# Altium PCB Choin1_0.PcbDoc (part 1 of 3)
Units mm, origin at the board's own origin, x right, y up, seen from the top; angles counter-clockwise.
Board outline 61 x 61 mm, 6 copper layers (Top Layer, MidLayer1, MidLayer 2, Mid-Layer 3, Mid-Layer 4, Bottom Layer), stack 1.533 mm thick; 195 components, 482 nets, 1610 pads, 432 vias.
Unrouted connection lines stored in the file: 170.
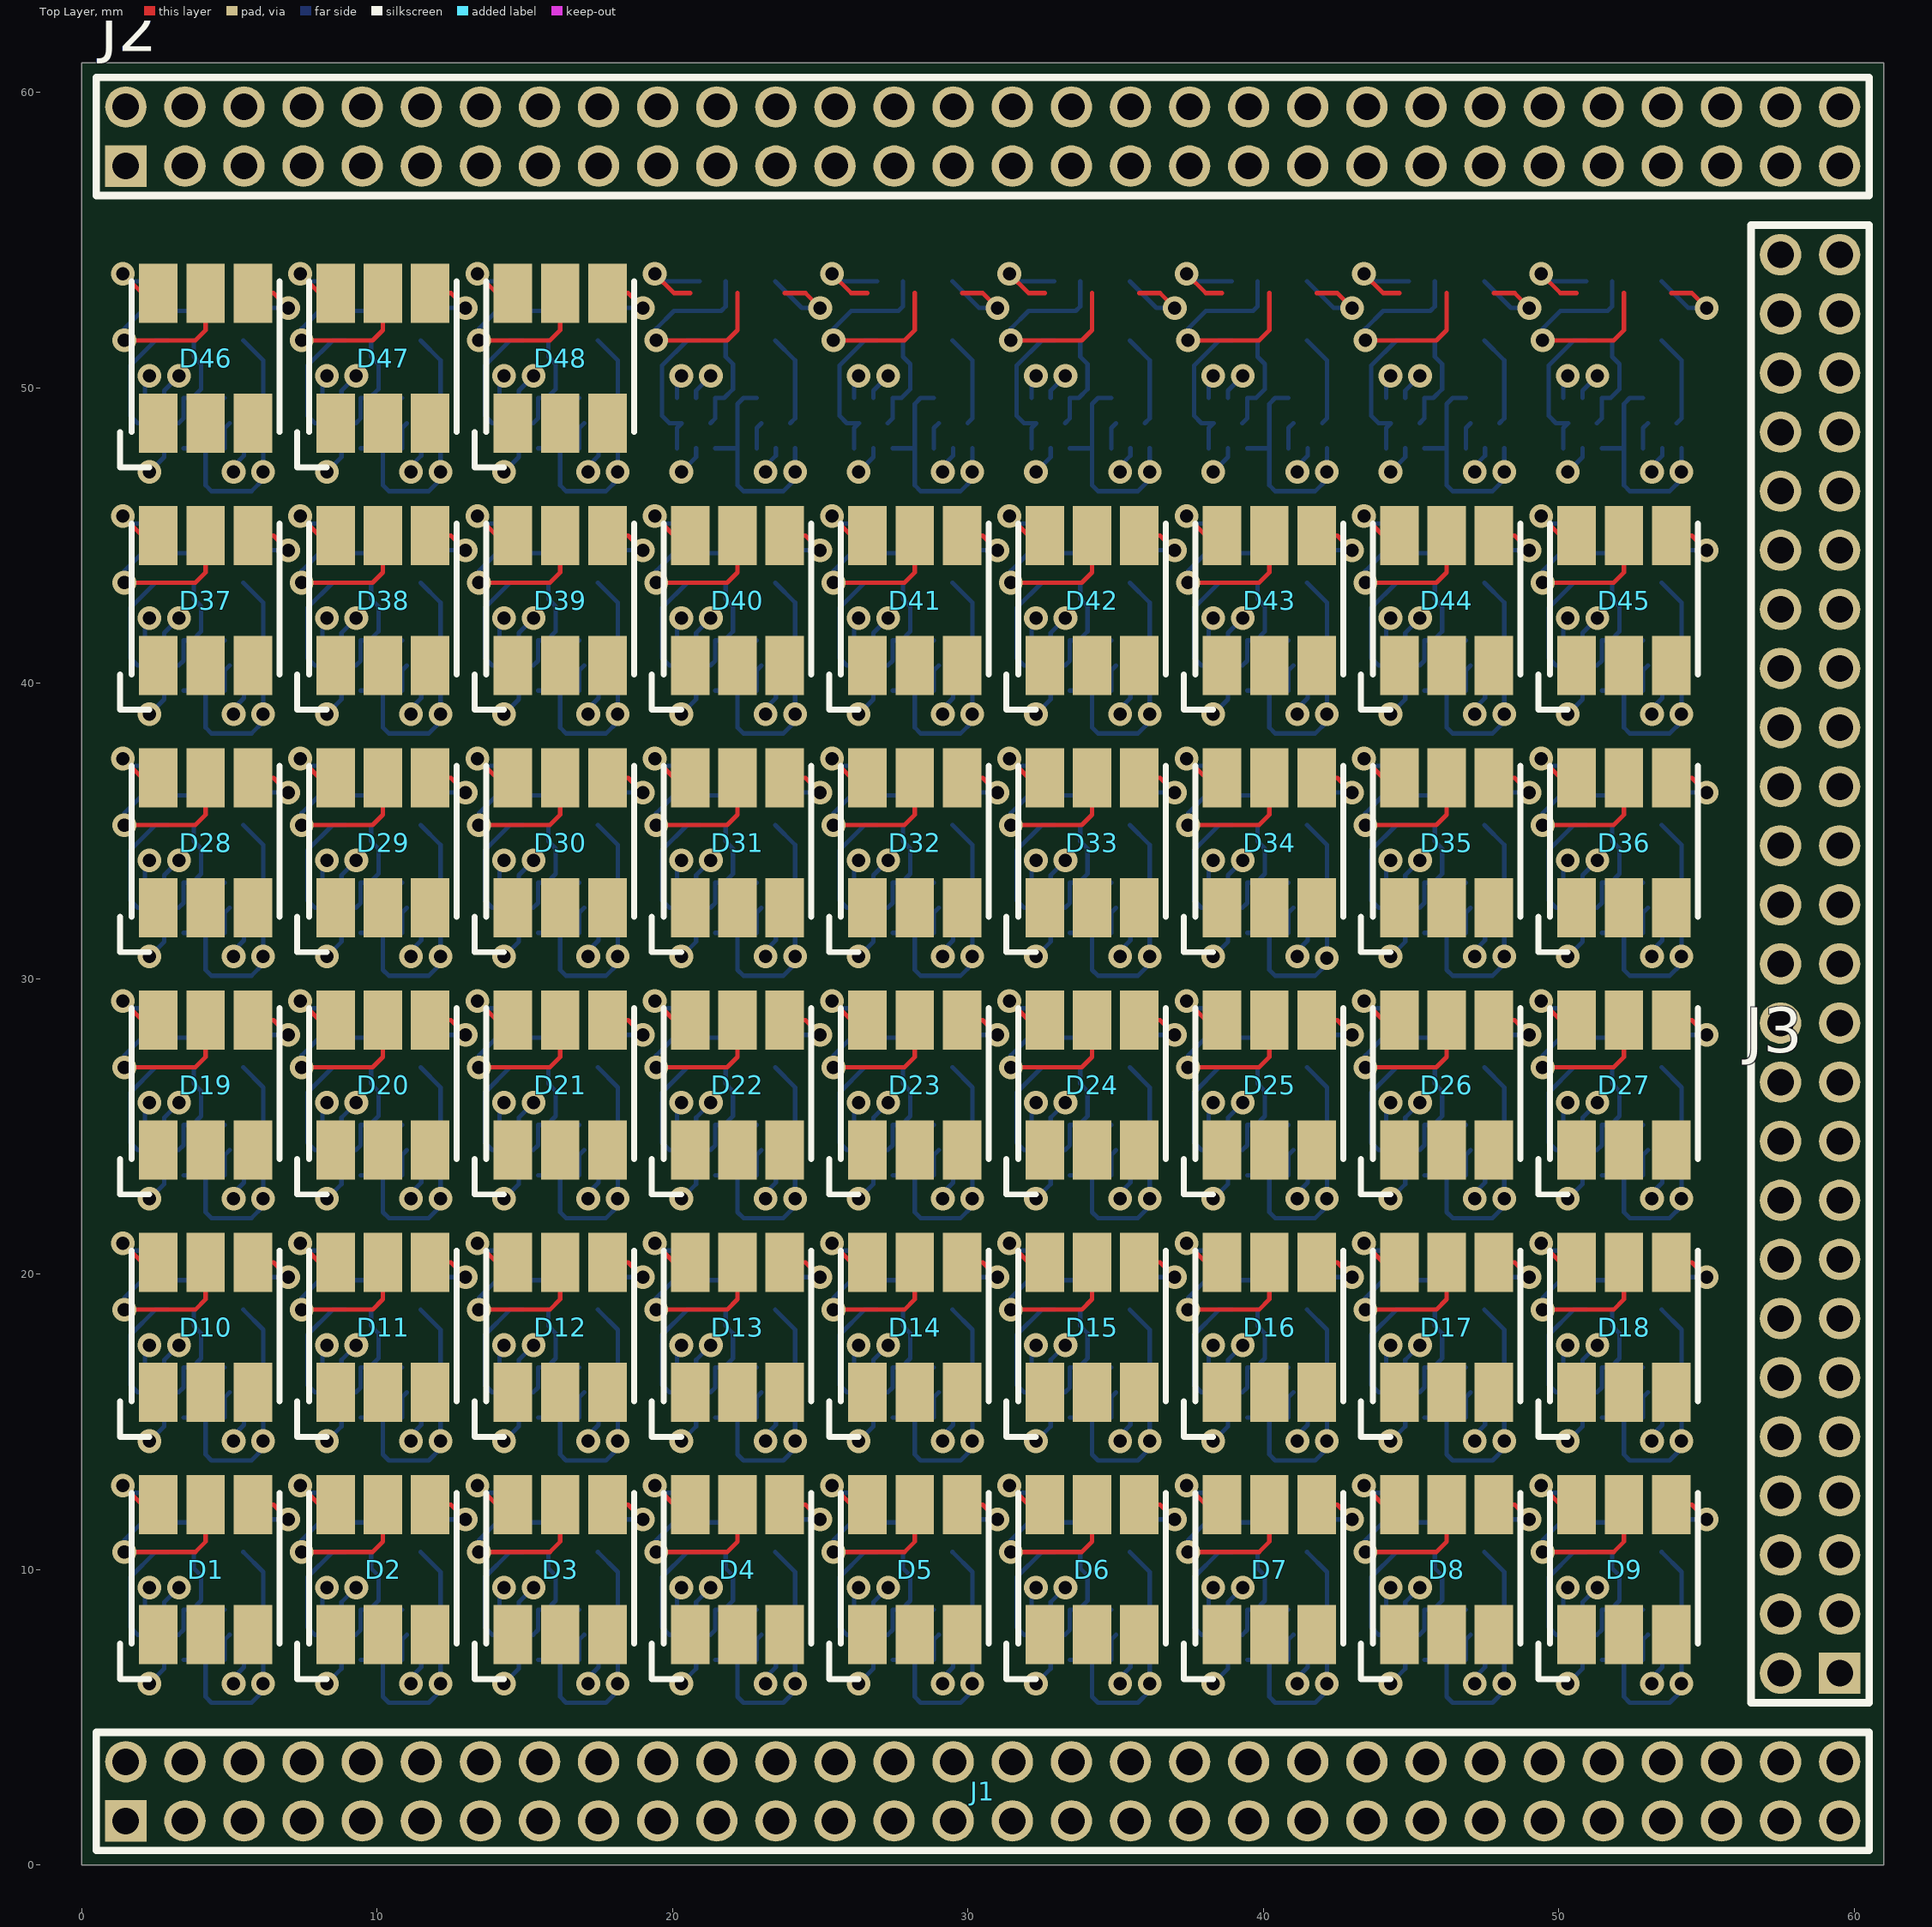
[diagram p0: Top Layer view]
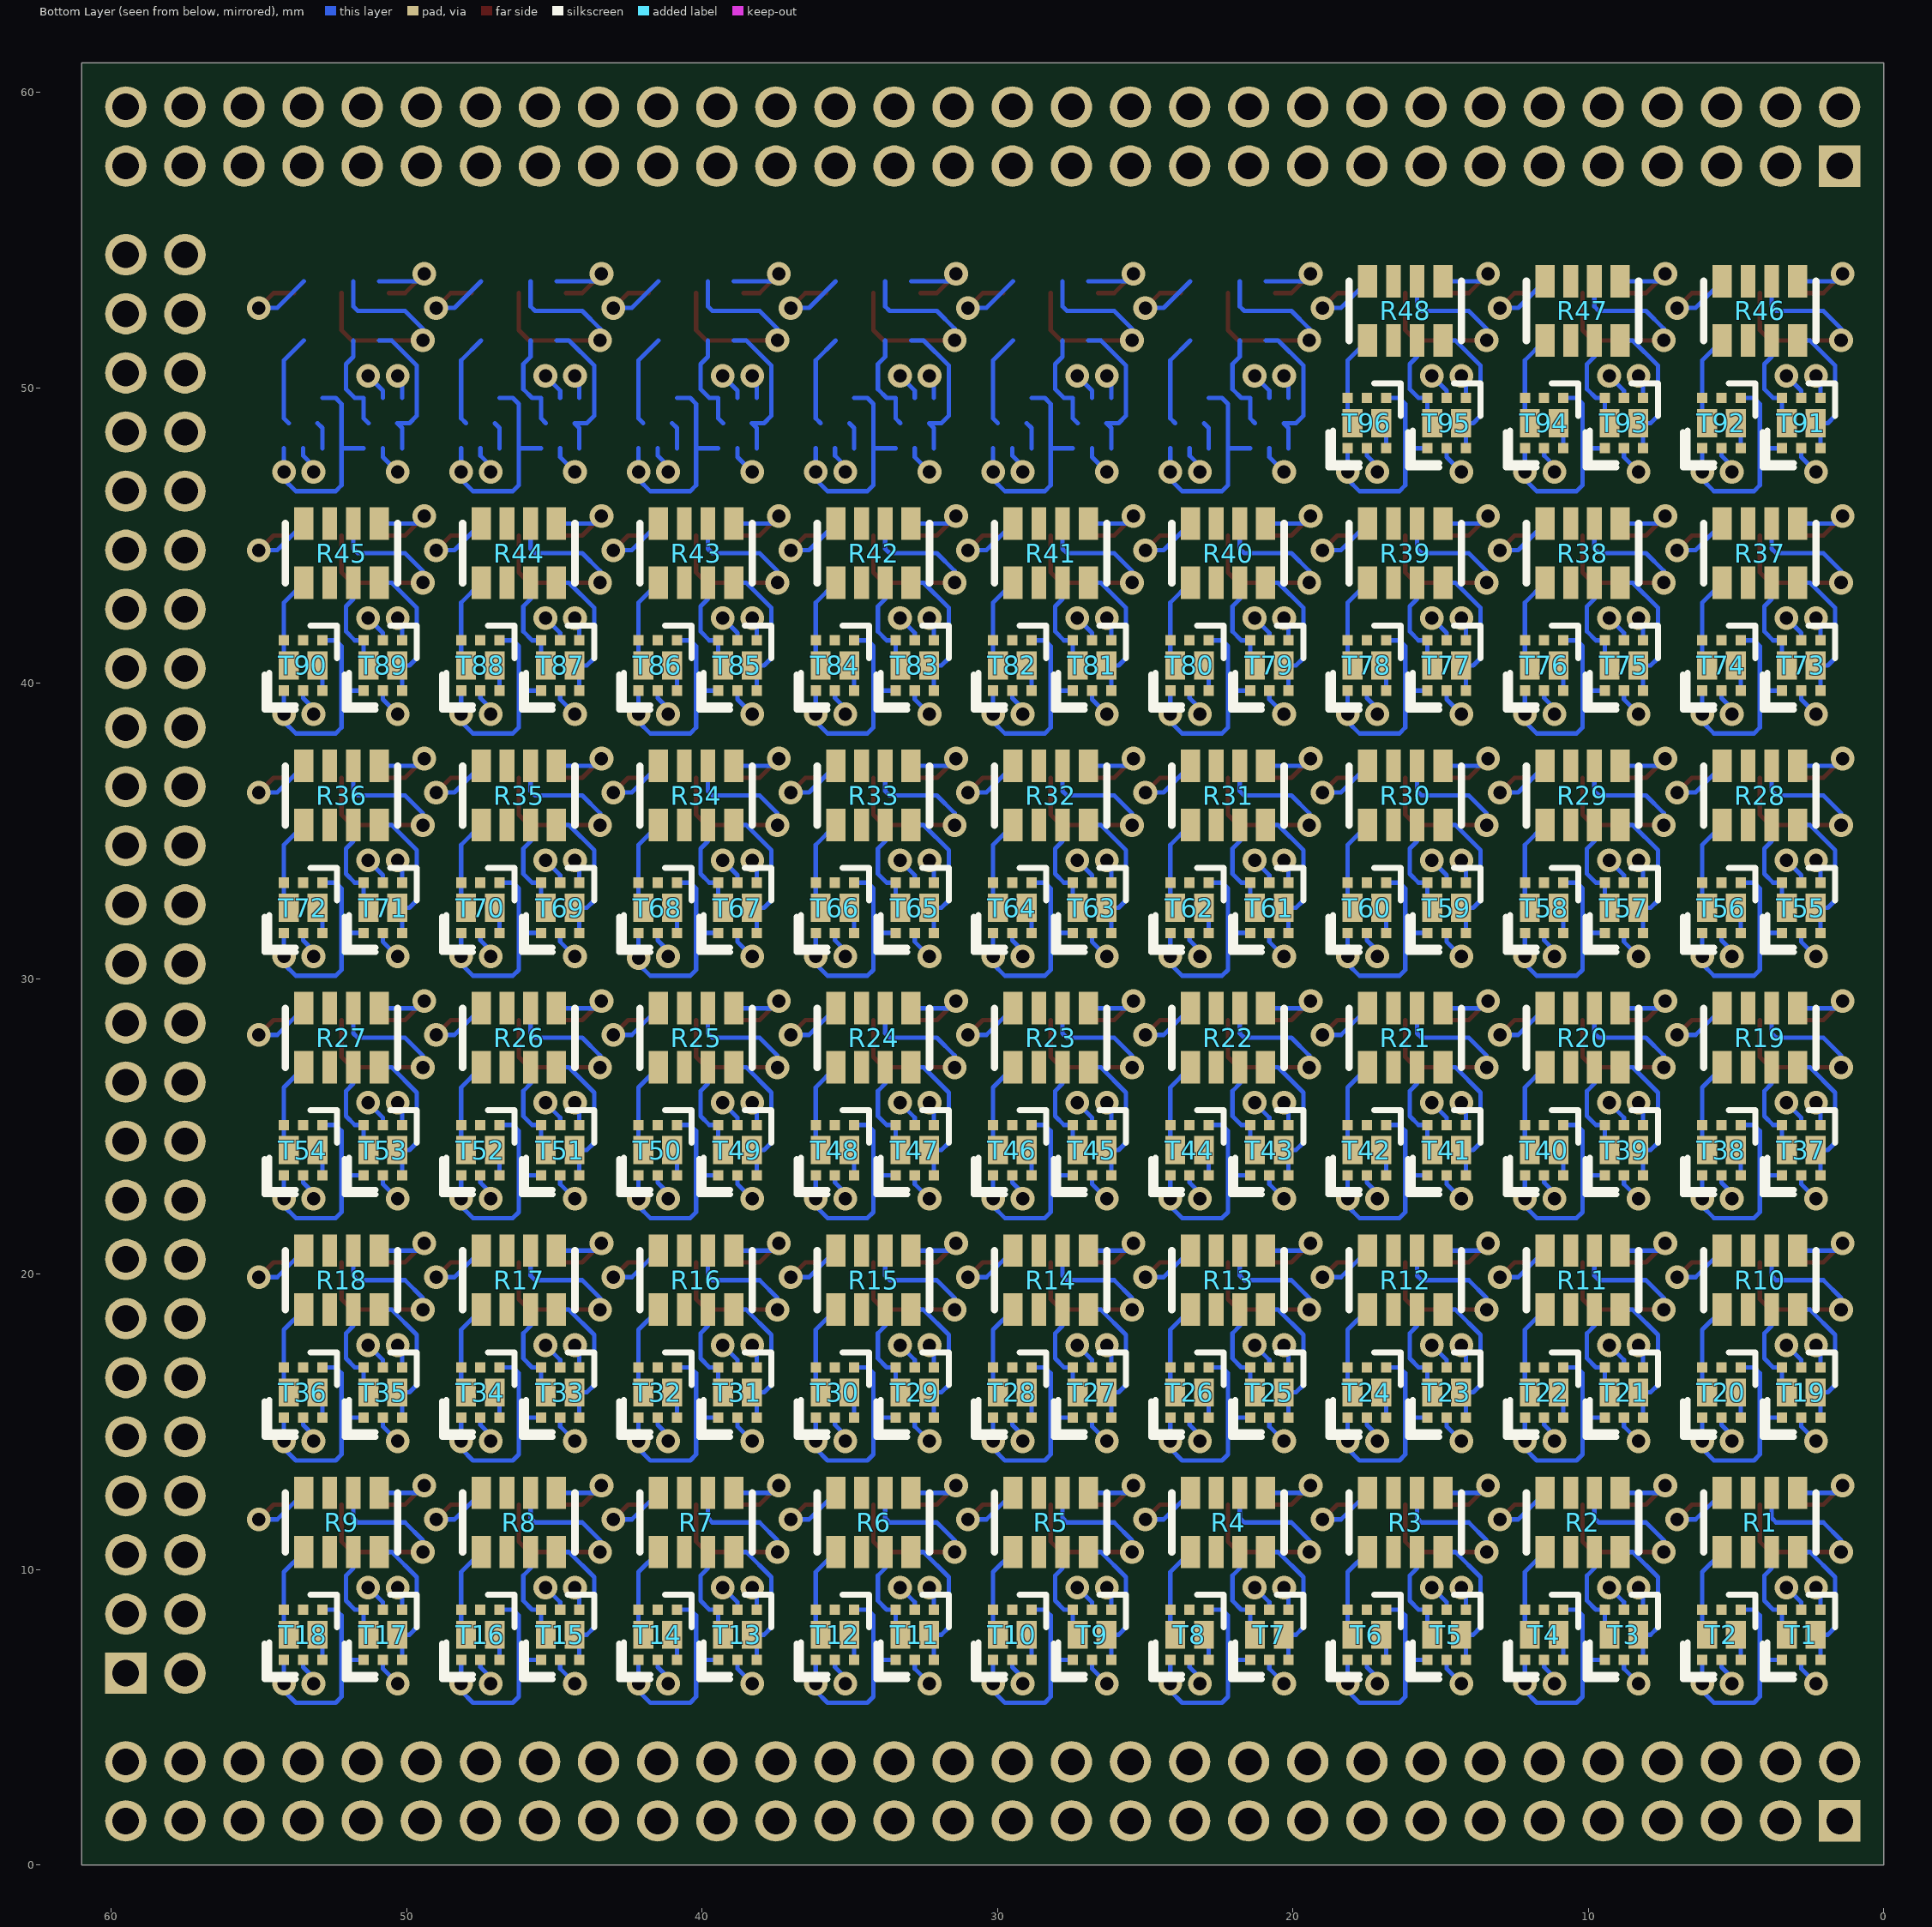
[diagram p1: Bottom Layer view, seen from below]

## Layer stack, top to bottom
Top Layer: signal copper 0.0356
Dielectric: core 0.3, FR-4, Dk 4.8
MidLayer1: signal copper 0.0356
Dielectric: prepreg 0.2, FR-4, Dk 4.8
MidLayer 2: signal copper 0.0356
Dielectric: core 0.3, FR-4, Dk 4.8
Mid-Layer 3: signal copper 0.0356
Dielectric: prepreg 0.2, FR-4, Dk 4.8
Mid-Layer 4: signal copper 0.0356
Dielectric: core 0.32, FR-4, Dk 4.8
Bottom Layer: signal copper 0.0356

## Board outline
0,0 61,0 61,61 0,61

## Design rules (kind name [scope] priority, off if disabled: settings)
Clearance [All] p1: gap=0.15
ComponentClearance [All] p1 off: gap=0.254 collisioncheckmode=3 verticalgap=0.254 showdistances=FALSE
HoleSize [All] p1: absolutevalues=TRUE maxlimit=2.54 minlimit=0.45 maxpercent=80.000 minpercent=20.000
MinimumSolderMaskSliver [All] p1 off: minsoldermaskwidth=0.254
PlaneClearance [All] p1: clearance=0.25
PlaneConnect [All] p1: planeconnectstyle=Relief reliefexpansion=0.25 reliefentries=4 reliefconductorwidth=0.15 reliefairgap=0.2
PolygonConnect [All] p1: connectstyle=Relief reliefconductorwidth=0.254 reliefentries=4 polygonreliefangle="90 Angle"
RoutingVias [All] p1: holewidth=0.45 width=0.8 viastyle="Through Hole" minholewidth=0.45 minwidth=0.8 maxholewidth=2 maxwidth=4
SilkToSilkClearance [All] p1 off: silktosilkclearance=0.254
SilkscreenOverComponentPads [All] p1: minsilkscreentomaskgap=0.1
SolderMaskExpansion [All] p1: expansion=0.102
Width [All] p1: maxlimit=4 minlimit=0.15 preferedwidth=0.15
21 further rules are at their usual default settings.

## Classes and differential pairs
net class GLEDR[47..0]: GLEDR0 GLEDR1 GLEDR2 GLEDR3 GLEDR4 GLEDR5 GLEDR6 GLEDR7 GLEDR8 GLEDR9 GLEDR10 GLEDR11 GLEDR12 GLEDR13 GLEDR14 GLEDR15 GLEDR16 GLEDR17 GLEDR18 GLEDR19 GLEDR20 GLEDR21 GLEDR22 GLEDR23 GLEDR24 GLEDR25 GLEDR26 GLEDR27 GLEDR28 GLEDR29 GLEDR30 GLEDR31 GLEDR32 GLEDR33 GLEDR34 GLEDR35 GLEDR36 GLEDR37 GLEDR38 GLEDR39 GLEDR40 GLEDR41 GLEDR42 GLEDR43 GLEDR44 GLEDR45 GLEDR46 GLEDR47
net class GLEDG[47..0]: GLEDG0 GLEDG1 GLEDG2 GLEDG3 GLEDG4 GLEDG5 GLEDG6 GLEDG7 GLEDG8 GLEDG9 GLEDG10 GLEDG11 GLEDG12 GLEDG13 GLEDG14 GLEDG15 GLEDG16 GLEDG17 GLEDG18 GLEDG19 GLEDG20 GLEDG21 GLEDG22 GLEDG23 GLEDG24 GLEDG25 GLEDG26 GLEDG27 GLEDG28 GLEDG29 GLEDG30 GLEDG31 GLEDG32 GLEDG33 GLEDG34 GLEDG35 GLEDG36 GLEDG37 GLEDG38 GLEDG39 GLEDG40 GLEDG41 GLEDG42 GLEDG43 GLEDG44 GLEDG45 GLEDG46 GLEDG47
net class GLEDB[47..0]: GLEDB0 GLEDB1 GLEDB2 GLEDB3 GLEDB4 GLEDB5 GLEDB6 GLEDB7 GLEDB8 GLEDB9 GLEDB10 GLEDB11 GLEDB12 GLEDB13 GLEDB14 GLEDB15 GLEDB16 GLEDB17 GLEDB18 GLEDB19 GLEDB20 GLEDB21 GLEDB22 GLEDB23 GLEDB24 GLEDB25 GLEDB26 GLEDB27 GLEDB28 GLEDB29 GLEDB30 GLEDB31 GLEDB32 GLEDB33 GLEDB34 GLEDB35 GLEDB36 GLEDB37 GLEDB38 GLEDB39 GLEDB40 GLEDB41 GLEDB42 GLEDB43 GLEDB44 GLEDB45 GLEDB46 GLEDB47
component class Zlacza: J1 J2 J3
net class RLEDR[47..0]: RLEDR0 RLEDR1 RLEDR2 RLEDR3 RLEDR4 RLEDR5 RLEDR6 RLEDR7 RLEDR8 RLEDR9 RLEDR10 RLEDR11 RLEDR12 RLEDR13 RLEDR14 RLEDR15 RLEDR16 RLEDR17 RLEDR18 RLEDR19 RLEDR20 RLEDR21 RLEDR22 RLEDR23 RLEDR24 RLEDR25 RLEDR26 RLEDR27 RLEDR28 RLEDR29 RLEDR30 RLEDR31 RLEDR32 RLEDR33 RLEDR34 RLEDR35 RLEDR36 RLEDR37 RLEDR38 RLEDR39 RLEDR40 RLEDR41 RLEDR42 RLEDR43 RLEDR44 RLEDR45 RLEDR46 RLEDR47
net class RLEDG[47..0]: RLEDG0 RLEDG1 RLEDG2 RLEDG3 RLEDG4 RLEDG5 RLEDG6 RLEDG7 RLEDG8 RLEDG9 RLEDG10 RLEDG11 RLEDG12 RLEDG13 RLEDG14 RLEDG15 RLEDG16 RLEDG17 RLEDG18 RLEDG19 RLEDG20 RLEDG21 RLEDG22 RLEDG23 RLEDG24 RLEDG25 RLEDG26 RLEDG27 RLEDG28 RLEDG29 RLEDG30 RLEDG31 RLEDG32 RLEDG33 RLEDG34 RLEDG35 RLEDG36 RLEDG37 RLEDG38 RLEDG39 RLEDG40 RLEDG41 RLEDG42 RLEDG43 RLEDG44 RLEDG45 RLEDG46 RLEDG47
net class RLEDB[47..0]: RLEDB0 RLEDB1 RLEDB2 RLEDB3 RLEDB4 RLEDB5 RLEDB6 RLEDB7 RLEDB8 RLEDB9 RLEDB10 RLEDB11 RLEDB12 RLEDB13 RLEDB14 RLEDB15 RLEDB16 RLEDB17 RLEDB18 RLEDB19 RLEDB20 RLEDB21 RLEDB22 RLEDB23 RLEDB24 RLEDB25 RLEDB26 RLEDB27 RLEDB28 RLEDB29 RLEDB30 RLEDB31 RLEDB32 RLEDB33 RLEDB34 RLEDB35 RLEDB36 RLEDB37 RLEDB38 RLEDB39 RLEDB40 RLEDB41 RLEDB42 RLEDB43 RLEDB44 RLEDB45 RLEDB46 RLEDB47
net class LEDR[47..0]: LEDR0 LEDR1 LEDR2 LEDR3 LEDR4 LEDR5 LEDR6 LEDR7 LEDR8 LEDR9 LEDR10 LEDR11 LEDR12 LEDR13 LEDR14 LEDR15 LEDR16 LEDR17 LEDR18 LEDR19 LEDR20 LEDR21 LEDR22 LEDR23 LEDR24 LEDR25 LEDR26 LEDR27 LEDR28 LEDR29 LEDR30 LEDR31 LEDR32 LEDR33 LEDR34 LEDR35 LEDR36 LEDR37 LEDR38 LEDR39 LEDR40 LEDR41 LEDR42 LEDR43 LEDR44 LEDR45 LEDR46 LEDR47
net class LEDG[47..0]: LEDG0 LEDG1 LEDG2 LEDG3 LEDG4 LEDG5 LEDG6 LEDG7 LEDG8 LEDG9 LEDG10 LEDG11 LEDG12 LEDG13 LEDG14 LEDG15 LEDG16 LEDG17 LEDG18 LEDG19 LEDG20 LEDG21 LEDG22 LEDG23 LEDG24 LEDG25 LEDG26 LEDG27 LEDG28 LEDG29 LEDG30 LEDG31 LEDG32 LEDG33 LEDG34 LEDG35 LEDG36 LEDG37 LEDG38 LEDG39 LEDG40 LEDG41 LEDG42 LEDG43 LEDG44 LEDG45 LEDG46 LEDG47
net class LEDB[47..0]: LEDB0 LEDB1 LEDB2 LEDB3 LEDB4 LEDB5 LEDB6 LEDB7 LEDB8 LEDB9 LEDB10 LEDB11 LEDB12 LEDB13 LEDB14 LEDB15 LEDB16 LEDB17 LEDB18 LEDB19 LEDB20 LEDB21 LEDB22 LEDB23 LEDB24 LEDB25 LEDB26 LEDB27 LEDB28 LEDB29 LEDB30 LEDB31 LEDB32 LEDB33 LEDB34 LEDB35 LEDB36 LEDB37 LEDB38 LEDB39 LEDB40 LEDB41 LEDB42 LEDB43 LEDB44 LEDB45 LEDB46 LEDB47
component class "Rezystory ogr.": R1 R2 R3 R4 R5 R6 R7 R8 R9 R10 R11 R12 R13 R14 R15 R16 R17 R18 R19 R20 R21 R22 R23 R24 R25 R26 R27 R28 R29 R30 R31 R32 R33 R34 R35 R36 R37 R38 R39 R40 R41 R42 R43 R44 R45 R46 R47 R48
component class LED: D1 D2 D3 D4 D5 D6 D7 D8 D9 D10 D11 D12 D13 D14 D15 D16 D17 D18 D19 D20 D21 D22 D23 D24 D25 D26 D27 D28 D29 D30 D31 D32 D33 D34 D35 D36 D37 D38 D39 D40 D41 D42 D43 D44 D45 D46 D47 D48
component class Tranzystory: T1 T2 T3 T4 T5 T6 T7 T8 T9 T10 T11 T12 T13 T14 T15 T16 T17 T18 T19 T20 T21 T22 T23 T24 T25 T26 T27 T28 T29 T30 T31 T32 T33 T34 T35 T36 T37 T38 T39 T40 T41 T42 T43 T44 T45 T46 T47 T48 T49 T50 T51 T52 T53 T54 T55 T56 T57 T58 T59 T60 T61 T62 T63 T64 T65 T66 T67 T68 T69 T70 T71 T72 T73 T74 T75 T76 T77 T78 T79 T80 T81 T82 T83 T84 T85 T86 T87 T88 T89 T90 T91 T92 T93 T94 T95 T96

## Components (designator, comment, footprint, x,y, rotation, side; value= is the part's Value field where it differs from the comment)
D1 "OF-SMD5060RGB-W" OF-SMD5060RGB-W 4.2,10 r90 top
D2 "OF-SMD5060RGB-W" OF-SMD5060RGB-W 10.2,10 r90 top
D3 "OF-SMD5060RGB-W" OF-SMD5060RGB-W 16.2,10 r90 top
D4 "OF-SMD5060RGB-W" OF-SMD5060RGB-W 22.2,10 r90 top
D5 "OF-SMD5060RGB-W" OF-SMD5060RGB-W 28.2,10 r90 top
D6 "OF-SMD5060RGB-W" OF-SMD5060RGB-W 34.2,10 r90 top
D7 "OF-SMD5060RGB-W" OF-SMD5060RGB-W 40.2,10 r90 top
D8 "OF-SMD5060RGB-W" OF-SMD5060RGB-W 46.2,10 r90 top
D9 "OF-SMD5060RGB-W" OF-SMD5060RGB-W 52.2,10 r90 top
D10 "OF-SMD5060RGB-W" OF-SMD5060RGB-W 4.2,18.2 r90 top
D11 "OF-SMD5060RGB-W" OF-SMD5060RGB-W 10.2,18.2 r90 top
D12 "OF-SMD5060RGB-W" OF-SMD5060RGB-W 16.2,18.2 r90 top
D13 "OF-SMD5060RGB-W" OF-SMD5060RGB-W 22.2,18.2 r90 top
D14 "OF-SMD5060RGB-W" OF-SMD5060RGB-W 28.2,18.2 r90 top
D15 "OF-SMD5060RGB-W" OF-SMD5060RGB-W 34.2,18.2 r90 top
D16 "OF-SMD5060RGB-W" OF-SMD5060RGB-W 40.2,18.2 r90 top
D17 "OF-SMD5060RGB-W" OF-SMD5060RGB-W 46.2,18.2 r90 top
D18 "OF-SMD5060RGB-W" OF-SMD5060RGB-W 52.2,18.2 r90 top
D19 "OF-SMD5060RGB-W" OF-SMD5060RGB-W 4.2,26.4 r90 top
D20 "OF-SMD5060RGB-W" OF-SMD5060RGB-W 10.2,26.4 r90 top
D21 "OF-SMD5060RGB-W" OF-SMD5060RGB-W 16.2,26.4 r90 top
D22 "OF-SMD5060RGB-W" OF-SMD5060RGB-W 22.2,26.4 r90 top
D23 "OF-SMD5060RGB-W" OF-SMD5060RGB-W 28.2,26.4 r90 top
D24 "OF-SMD5060RGB-W" OF-SMD5060RGB-W 34.2,26.4 r90 top
D25 "OF-SMD5060RGB-W" OF-SMD5060RGB-W 40.2,26.4 r90 top
D26 "OF-SMD5060RGB-W" OF-SMD5060RGB-W 46.2,26.4 r90 top
D27 "OF-SMD5060RGB-W" OF-SMD5060RGB-W 52.2,26.4 r90 top
D28 "OF-SMD5060RGB-W" OF-SMD5060RGB-W 4.2,34.6 r90 top
D29 "OF-SMD5060RGB-W" OF-SMD5060RGB-W 10.2,34.6 r90 top
D30 "OF-SMD5060RGB-W" OF-SMD5060RGB-W 16.2,34.6 r90 top
D31 "OF-SMD5060RGB-W" OF-SMD5060RGB-W 22.2,34.6 r90 top
D32 "OF-SMD5060RGB-W" OF-SMD5060RGB-W 28.2,34.6 r90 top
D33 "OF-SMD5060RGB-W" OF-SMD5060RGB-W 34.2,34.6 r90 top
D34 "OF-SMD5060RGB-W" OF-SMD5060RGB-W 40.2,34.6 r90 top
D35 "OF-SMD5060RGB-W" OF-SMD5060RGB-W 46.2,34.6 r90 top
D36 "OF-SMD5060RGB-W" OF-SMD5060RGB-W 52.2,34.6 r90 top
D37 "OF-SMD5060RGB-W" OF-SMD5060RGB-W 4.2,42.8 r90 top
D38 "OF-SMD5060RGB-W" OF-SMD5060RGB-W 10.2,42.8 r90 top
D39 "OF-SMD5060RGB-W" OF-SMD5060RGB-W 16.2,42.8 r90 top
D40 "OF-SMD5060RGB-W" OF-SMD5060RGB-W 22.2,42.8 r90 top
D41 "OF-SMD5060RGB-W" OF-SMD5060RGB-W 28.2,42.8 r90 top
D42 "OF-SMD5060RGB-W" OF-SMD5060RGB-W 34.2,42.8 r90 top
D43 "OF-SMD5060RGB-W" OF-SMD5060RGB-W 40.2,42.8 r90 top
D44 "OF-SMD5060RGB-W" OF-SMD5060RGB-W 46.2,42.8 r90 top
D45 "OF-SMD5060RGB-W" OF-SMD5060RGB-W 52.2,42.8 r90 top
D46 "OF-SMD5060RGB-W" OF-SMD5060RGB-W 4.2,51 r90 top
D47 "OF-SMD5060RGB-W" OF-SMD5060RGB-W 10.2,51 r90 top
D48 "OF-SMD5060RGB-W" OF-SMD5060RGB-W 16.2,51 r90 top
J1 "PLMD80S-60pin" PLMD60S 1.5,2.5 r0 top locked
J2 "PLMD80S-60pin" PLMD60S 1.5,58.5 r0 top locked
J3 "PLMD80S-50pin" PLMD50S 58.5,6.5 r90 top locked
R1 "CAY16-6800F4" 1206RPS 4.2,11.6 r180 bottom
R2 "CAY16-6800F4" 1206RPS 10.2,11.6 r180 bottom
R3 "CAY16-6800F4" 1206RPS 16.2,11.6 r180 bottom
R4 "CAY16-6800F4" 1206RPS 22.2,11.6 r180 bottom
R5 "CAY16-6800F4" 1206RPS 28.2,11.6 r180 bottom
R6 "CAY16-6800F4" 1206RPS 34.2,11.6 r180 bottom
R7 "CAY16-6800F4" 1206RPS 40.2,11.6 r180 bottom
R8 "CAY16-6800F4" 1206RPS 46.2,11.6 r180 bottom
R9 "CAY16-6800F4" 1206RPS 52.2,11.6 r180 bottom
R10 "CAY16-6800F4" 1206RPS 4.2,19.8 r180 bottom
R11 "CAY16-6800F4" 1206RPS 10.2,19.8 r180 bottom
R12 "CAY16-6800F4" 1206RPS 16.2,19.8 r180 bottom
R13 "CAY16-6800F4" 1206RPS 22.2,19.8 r180 bottom
R14 "CAY16-6800F4" 1206RPS 28.2,19.8 r180 bottom
R15 "CAY16-6800F4" 1206RPS 34.2,19.8 r180 bottom
R16 "CAY16-6800F4" 1206RPS 40.2,19.8 r180 bottom
R17 "CAY16-6800F4" 1206RPS 46.2,19.8 r180 bottom
R18 "CAY16-6800F4" 1206RPS 52.2,19.8 r180 bottom
R19 "CAY16-6800F4" 1206RPS 4.2,28 r180 bottom
R20 "CAY16-6800F4" 1206RPS 10.2,28 r180 bottom
R21 "CAY16-6800F4" 1206RPS 16.2,28 r180 bottom
R22 "CAY16-6800F4" 1206RPS 22.2,28 r180 bottom
R23 "CAY16-6800F4" 1206RPS 28.2,28 r180 bottom
R24 "CAY16-6800F4" 1206RPS 34.2,28 r180 bottom
R25 "CAY16-6800F4" 1206RPS 40.2,28 r180 bottom
R26 "CAY16-6800F4" 1206RPS 46.2,28 r180 bottom
R27 "CAY16-6800F4" 1206RPS 52.2,28 r180 bottom
R28 "CAY16-6800F4" 1206RPS 4.2,36.2 r180 bottom
R29 "CAY16-6800F4" 1206RPS 10.2,36.2 r180 bottom
R30 "CAY16-6800F4" 1206RPS 16.2,36.2 r180 bottom
R31 "CAY16-6800F4" 1206RPS 22.2,36.2 r180 bottom
R32 "CAY16-6800F4" 1206RPS 28.2,36.2 r180 bottom
R33 "CAY16-6800F4" 1206RPS 34.2,36.2 r180 bottom
R34 "CAY16-6800F4" 1206RPS 40.2,36.2 r180 bottom
R35 "CAY16-6800F4" 1206RPS 46.2,36.2 r180 bottom
R36 "CAY16-6800F4" 1206RPS 52.2,36.2 r180 bottom
R37 "CAY16-6800F4" 1206RPS 4.2,44.4 r180 bottom
R38 "CAY16-6800F4" 1206RPS 10.2,44.4 r180 bottom
R39 "CAY16-6800F4" 1206RPS 16.2,44.4 r180 bottom
R40 "CAY16-6800F4" 1206RPS 22.2,44.4 r180 bottom
R41 "CAY16-6800F4" 1206RPS 28.2,44.4 r180 bottom
R42 "CAY16-6800F4" 1206RPS 34.2,44.4 r180 bottom
R43 "CAY16-6800F4" 1206RPS 40.2,44.4 r180 bottom
R44 "CAY16-6800F4" 1206RPS 46.2,44.4 r180 bottom
R45 "CAY16-6800F4" 1206RPS 52.2,44.4 r180 bottom
R46 "CAY16-6800F4" 1206RPS 4.2,52.6 r180 bottom
R47 "CAY16-6800F4" 1206RPS 10.2,52.6 r180 bottom
R48 "CAY16-6800F4" 1206RPS 16.2,52.6 r180 bottom
T1 "IRLHS6376TR2PBF" PQFN2X2DUAL 2.8,7.8 r180 bottom
T2 "IRLHS6376TR2PBF" PQFN2X2DUAL 5.5,7.8 r180 bottom
T3 "IRLHS6376TR2PBF" PQFN2X2DUAL 8.8,7.8 r180 bottom
T4 "IRLHS6376TR2PBF" PQFN2X2DUAL 11.5,7.8 r180 bottom
T5 "IRLHS6376TR2PBF" PQFN2X2DUAL 14.8,7.8 r180 bottom
T6 "IRLHS6376TR2PBF" PQFN2X2DUAL 17.5,7.8 r180 bottom
T7 "IRLHS6376TR2PBF" PQFN2X2DUAL 20.8,7.8 r180 bottom
T8 "IRLHS6376TR2PBF" PQFN2X2DUAL 23.5,7.8 r180 bottom
T9 "IRLHS6376TR2PBF" PQFN2X2DUAL 26.8,7.8 r180 bottom
T10 "IRLHS6376TR2PBF" PQFN2X2DUAL 29.5,7.8 r180 bottom
T11 "IRLHS6376TR2PBF" PQFN2X2DUAL 32.8,7.8 r180 bottom
T12 "IRLHS6376TR2PBF" PQFN2X2DUAL 35.5,7.8 r180 bottom
T13 "IRLHS6376TR2PBF" PQFN2X2DUAL 38.8,7.8 r180 bottom
T14 "IRLHS6376TR2PBF" PQFN2X2DUAL 41.5,7.8 r180 bottom
T15 "IRLHS6376TR2PBF" PQFN2X2DUAL 44.8,7.8 r180 bottom
T16 "IRLHS6376TR2PBF" PQFN2X2DUAL 47.5,7.8 r180 bottom
T17 "IRLHS6376TR2PBF" PQFN2X2DUAL 50.8,7.8 r180 bottom
T18 "IRLHS6376TR2PBF" PQFN2X2DUAL 53.5,7.8 r180 bottom
T19 "IRLHS6376TR2PBF" PQFN2X2DUAL 2.8,16 r180 bottom
T20 "IRLHS6376TR2PBF" PQFN2X2DUAL 5.5,16 r180 bottom
T21 "IRLHS6376TR2PBF" PQFN2X2DUAL 8.8,16 r180 bottom
T22 "IRLHS6376TR2PBF" PQFN2X2DUAL 11.5,16 r180 bottom
T23 "IRLHS6376TR2PBF" PQFN2X2DUAL 14.8,16 r180 bottom
T24 "IRLHS6376TR2PBF" PQFN2X2DUAL 17.5,16 r180 bottom
T25 "IRLHS6376TR2PBF" PQFN2X2DUAL 20.8,16 r180 bottom
T26 "IRLHS6376TR2PBF" PQFN2X2DUAL 23.5,16 r180 bottom
T27 "IRLHS6376TR2PBF" PQFN2X2DUAL 26.8,16 r180 bottom
T28 "IRLHS6376TR2PBF" PQFN2X2DUAL 29.5,16 r180 bottom
T29 "IRLHS6376TR2PBF" PQFN2X2DUAL 32.8,16 r180 bottom
T30 "IRLHS6376TR2PBF" PQFN2X2DUAL 35.5,16 r180 bottom
T31 "IRLHS6376TR2PBF" PQFN2X2DUAL 38.8,16 r180 bottom
T32 "IRLHS6376TR2PBF" PQFN2X2DUAL 41.5,16 r180 bottom
T33 "IRLHS6376TR2PBF" PQFN2X2DUAL 44.8,16 r180 bottom
T34 "IRLHS6376TR2PBF" PQFN2X2DUAL 47.5,16 r180 bottom
T35 "IRLHS6376TR2PBF" PQFN2X2DUAL 50.8,16 r180 bottom
T36 "IRLHS6376TR2PBF" PQFN2X2DUAL 53.5,16 r180 bottom
T37 "IRLHS6376TR2PBF" PQFN2X2DUAL 2.8,24.2 r180 bottom
T38 "IRLHS6376TR2PBF" PQFN2X2DUAL 5.5,24.2 r180 bottom
T39 "IRLHS6376TR2PBF" PQFN2X2DUAL 8.8,24.2 r180 bottom
T40 "IRLHS6376TR2PBF" PQFN2X2DUAL 11.5,24.2 r180 bottom
T41 "IRLHS6376TR2PBF" PQFN2X2DUAL 14.8,24.2 r180 bottom
T42 "IRLHS6376TR2PBF" PQFN2X2DUAL 17.5,24.2 r180 bottom
T43 "IRLHS6376TR2PBF" PQFN2X2DUAL 20.8,24.2 r180 bottom
T44 "IRLHS6376TR2PBF" PQFN2X2DUAL 23.5,24.2 r180 bottom
T45 "IRLHS6376TR2PBF" PQFN2X2DUAL 26.8,24.2 r180 bottom
T46 "IRLHS6376TR2PBF" PQFN2X2DUAL 29.5,24.2 r180 bottom
T47 "IRLHS6376TR2PBF" PQFN2X2DUAL 32.8,24.2 r180 bottom
T48 "IRLHS6376TR2PBF" PQFN2X2DUAL 35.5,24.2 r180 bottom
T49 "IRLHS6376TR2PBF" PQFN2X2DUAL 38.8,24.2 r180 bottom
T50 "IRLHS6376TR2PBF" PQFN2X2DUAL 41.5,24.2 r180 bottom
T51 "IRLHS6376TR2PBF" PQFN2X2DUAL 44.8,24.2 r180 bottom
T52 "IRLHS6376TR2PBF" PQFN2X2DUAL 47.5,24.2 r180 bottom
T53 "IRLHS6376TR2PBF" PQFN2X2DUAL 50.8,24.2 r180 bottom
T54 "IRLHS6376TR2PBF" PQFN2X2DUAL 53.5,24.2 r180 bottom
T55 "IRLHS6376TR2PBF" PQFN2X2DUAL 2.8,32.4 r180 bottom
T56 "IRLHS6376TR2PBF" PQFN2X2DUAL 5.5,32.4 r180 bottom
T57 "IRLHS6376TR2PBF" PQFN2X2DUAL 8.8,32.4 r180 bottom
T58 "IRLHS6376TR2PBF" PQFN2X2DUAL 11.5,32.4 r180 bottom
T59 "IRLHS6376TR2PBF" PQFN2X2DUAL 14.8,32.4 r180 bottom
T60 "IRLHS6376TR2PBF" PQFN2X2DUAL 17.5,32.4 r180 bottom
T61 "IRLHS6376TR2PBF" PQFN2X2DUAL 20.8,32.4 r180 bottom
T62 "IRLHS6376TR2PBF" PQFN2X2DUAL 23.5,32.4 r180 bottom
T63 "IRLHS6376TR2PBF" PQFN2X2DUAL 26.8,32.4 r180 bottom
T64 "IRLHS6376TR2PBF" PQFN2X2DUAL 29.5,32.4 r180 bottom
T65 "IRLHS6376TR2PBF" PQFN2X2DUAL 32.8,32.4 r180 bottom
T66 "IRLHS6376TR2PBF" PQFN2X2DUAL 35.5,32.4 r180 bottom
T67 "IRLHS6376TR2PBF" PQFN2X2DUAL 38.8,32.4 r180 bottom
T68 "IRLHS6376TR2PBF" PQFN2X2DUAL 41.5,32.4 r180 bottom
T69 "IRLHS6376TR2PBF" PQFN2X2DUAL 44.8,32.4 r180 bottom
T70 "IRLHS6376TR2PBF" PQFN2X2DUAL 47.5,32.4 r180 bottom
T71 "IRLHS6376TR2PBF" PQFN2X2DUAL 50.8,32.4 r180 bottom
T72 "IRLHS6376TR2PBF" PQFN2X2DUAL 53.5,32.4 r180 bottom
T73 "IRLHS6376TR2PBF" PQFN2X2DUAL 2.8,40.6 r180 bottom
T74 "IRLHS6376TR2PBF" PQFN2X2DUAL 5.5,40.6 r180 bottom
T75 "IRLHS6376TR2PBF" PQFN2X2DUAL 8.8,40.6 r180 bottom
T76 "IRLHS6376TR2PBF" PQFN2X2DUAL 11.5,40.6 r180 bottom
T77 "IRLHS6376TR2PBF" PQFN2X2DUAL 14.8,40.6 r180 bottom
T78 "IRLHS6376TR2PBF" PQFN2X2DUAL 17.5,40.6 r180 bottom
T79 "IRLHS6376TR2PBF" PQFN2X2DUAL 20.8,40.6 r180 bottom
T80 "IRLHS6376TR2PBF" PQFN2X2DUAL 23.5,40.6 r180 bottom
T81 "IRLHS6376TR2PBF" PQFN2X2DUAL 26.8,40.6 r180 bottom
T82 "IRLHS6376TR2PBF" PQFN2X2DUAL 29.5,40.6 r180 bottom
T83 "IRLHS6376TR2PBF" PQFN2X2DUAL 32.8,40.6 r180 bottom
T84 "IRLHS6376TR2PBF" PQFN2X2DUAL 35.5,40.6 r180 bottom
T85 "IRLHS6376TR2PBF" PQFN2X2DUAL 38.8,40.6 r180 bottom
T86 "IRLHS6376TR2PBF" PQFN2X2DUAL 41.5,40.6 r180 bottom
T87 "IRLHS6376TR2PBF" PQFN2X2DUAL 44.8,40.6 r180 bottom
T88 "IRLHS6376TR2PBF" PQFN2X2DUAL 47.5,40.6 r180 bottom
T89 "IRLHS6376TR2PBF" PQFN2X2DUAL 50.8,40.6 r180 bottom
T90 "IRLHS6376TR2PBF" PQFN2X2DUAL 53.5,40.6 r180 bottom
T91 "IRLHS6376TR2PBF" PQFN2X2DUAL 2.8,48.8 r180 bottom
T92 "IRLHS6376TR2PBF" PQFN2X2DUAL 5.5,48.8 r180 bottom
T93 "IRLHS6376TR2PBF" PQFN2X2DUAL 8.8,48.8 r180 bottom
T94 "IRLHS6376TR2PBF" PQFN2X2DUAL 11.5,48.8 r180 bottom
T95 "IRLHS6376TR2PBF" PQFN2X2DUAL 14.8,48.8 r180 bottom
T96 "IRLHS6376TR2PBF" PQFN2X2DUAL 17.5,48.8 r180 bottom

## Footprints (in the part's own frame and the unit in brackets; to place one, negate y for a bottom-side part, rotate by r counter-clockwise, add the part's x,y. Pads: shape width x height; smd on the part's side, far side on the other; paste and mask are expansions set on the pad)
1206RPS [mm]
  rect 0.65x1.1 smd: 1(-1.275,-1) 4(1.275,-1) 5(1.275,1) 8(-1.275,1)
  rect 0.5x1.1 smd: 2(-0.4,-1) 3(0.4,-1) 6(0.4,1) 7(-0.4,1)
  silkscreen extent -1.9,-1 1.9,1, body extent -1.6,-0.8 1.6,0.8, height 0.55
OF-SMD5060RGB-W [mm]
  rect 2x1.3 smd: 1(-2.2,1.6) 2(-2.2,0) 3(-2.2,-1.6) 4(2.2,1.6) 5(2.2,0) 6(2.2,-1.6)
  silkscreen extent -3.7,-2.5 2.6,2.9, body extent -2.9,-2.5 2.9,2.5, height 1.7
PLMD50S [mm]
  rect 1.4x1.4 hole 0.9: 1(0,-1)
  round 1.4 hole 0.9: 2(0,1) 3(2,-1) 4(2,1) 5(4,-1) 6(4,1) 7(6,-1) 8(6,1) 9(8,-1) 10(8,1) 11(10,-1) 12(10,1) 13(12,-1) 14(12,1) 15(14,-1) 16(14,1) 17(16,-1) 18(16,1) 19(18,-1) 20(18,1) 21(20,-1) 22(20,1) 23(22,-1) 24(22,1) 25(24,-1) 26(24,1) 27(26,-1) 28(26,1) 29(28,-1) 30(28,1) 31(30,-1) 32(30,1) 33(32,-1) 34(32,1) 35(34,-1) 36(34,1) 37(36,-1) 38(36,1) 39(38,-1) 40(38,1) 41(40,-1) 42(40,1) 43(42,-1) 44(42,1) 45(44,-1) 46(44,1) 47(46,-1) 48(46,1) 49(48,-1) 50(48,1)
  silkscreen extent -1,-2 49,2, body extent -1,-2 49,2, height 6
PLMD60S [mm]
  rect 1.4x1.4 hole 0.9: 1(0,-1)
  round 1.4 hole 0.9: 2(0,1) 3(2,-1) 4(2,1) 5(4,-1) 6(4,1) 7(6,-1) 8(6,1) 9(8,-1) 10(8,1) 11(10,-1) 12(10,1) 13(12,-1) 14(12,1) 15(14,-1) 16(14,1) 17(16,-1) 18(16,1) 19(18,-1) 20(18,1) 21(20,-1) 22(20,1) 23(22,-1) 24(22,1) 25(24,-1) 26(24,1) 27(26,-1) 28(26,1) 29(28,-1) 30(28,1) 31(30,-1) 32(30,1) 33(32,-1) 34(32,1) 35(34,-1) 36(34,1) 37(36,-1) 38(36,1) 39(38,-1) 40(38,1) 41(40,-1) 42(40,1) 43(42,-1) 44(42,1) 45(44,-1) 46(44,1) 47(46,-1) 48(46,1) 49(48,-1) 50(48,1) 51(50,-1) 52(50,1) 53(52,-1) 54(52,1) 55(54,-1) 56(54,1) 57(56,-1) 58(56,1) 59(58,-1) 60(58,1)
  silkscreen extent -1,-2 59,2, body extent -1,-2 59,2, height 6
PQFN2X2DUAL [mm]
  rect 0.35x0.35 smd paste-0.025 mask+0.05: 1(-0.65,-0.85) 2(0,-0.85) 3(0.65,-0.85) 4(0.65,0.85) 5(0,0.85) 6(-0.65,0.85)
  rect 0.675x0.95 smd paste-10 mask+0.05: 7(-0.487,0) 8(0.487,0)
  silkscreen extent -1.3,-1.5 1.15,1.35

## Part data
D1 D2 D3 D4 D5 D6 D7 D8 D9 D10 D11 D12 D13 D14 D15 D16 D17 D18 D19 D20 D21 D22 D23 D24 D25 D26 D27 D28 D29 D30 D31 D32 D33 D34 D35 D36 D37 D38 D39 D40 D41 D42 D43 D44 D45 D46 D47 D48: library part OF-SMD5060RGB-W[[/\]]5060
J1 J2: library part PLMD80S-60pin[[/\]]30x2x2mm
J3: library part PLMD80S-50pin[[/\]]25x2x2mm
R1 R2 R3 R4 R5 R6 R7 R8 R9 R10 R11 R12 R13 R14 R15 R16 R17 R18 R19 R20 R21 R22 R23 R24 R25 R26 R27 R28 R29 R30 R31 R32 R33 R34 R35 R36 R37 R38 R39 R40 R41 R42 R43 R44 R45 R46 R47 R48: library part "CAY16-6800F4[[/\]]1206RP[[/\]]0.063W[[/\]]1%[[/\]]4x680R 1%"
T1 T2 T3 T4 T5 T6 T7 T8 T9 T10 T11 T12 T13 T14 T15 T16 T17 T18 T19 T20 T21 T22 T23 T24 T25 T26 T27 T28 T29 T30 T31 T32 T33 T34 T35 T36 T37 T38 T39 T40 T41 T42 T43 T44 T45 T46 T47 T48 T49 T50 T51 T52 T53 T54 T55 T56 T57 T58 T59 T60 T61 T62 T63 T64 T65 T66 T67 T68 T69 T70 T71 T72 T73 T74 T75 T76 T77 T78 T79 T80 T81 T82 T83 T84 T85 T86 T87 T88 T89 T90 T91 T92 T93 T94 T95 T96: library part IRLHS6376TR2PBF[[/\]]PQFN2X2DUAL

## Via types
v1: diameter 0.8, hole 0.45, Top Layer to Bottom Layer, 432 vias

## Nets (pads, with @x,y where several pads share a name; then routed paths per layer and width w, separated by ;. In a path a pad name is that pad's centre, name@x,y a point inside that pad or via, vN(x,y) a via of type N, cw(c..) or ccw(c..) an arc to the next point about the centre after c; other vN are vias at no path point)
+5V: D1.1 D1.2 D1.3 D2.1 D2.2 D2.3 D3.1 D3.2 D3.3 D4.1 D4.2 D4.3 D5.1 D5.2 D5.3 D6.1 D6.2 D6.3 D7.1 D7.2 D7.3 D8.1 D8.2 D8.3 D9.1 D9.2 D9.3 D10.1 D10.2 D10.3 D11.1 D11.2 D11.3 D12.1 D12.2 D12.3 D13.1 D13.2 D13.3 D14.1 D14.2 D14.3 D15.1 D15.2 D15.3 D16.1 D16.2 D16.3 D17.1 D17.2 D17.3 D18.1 D18.2 D18.3 D19.1 D19.2 D19.3 D20.1 D20.2 D20.3 D21.1 D21.2 D21.3 D22.1 D22.2 D22.3 D23.1 D23.2 D23.3 D24.1 D24.2 D24.3 D25.1 D25.2 D25.3 D26.1 D26.2 D26.3 D27.1 D27.2 D27.3 D30.1 D30.2 D30.3 D31.1 D31.2 D31.3 D32.1 D32.2 D32.3 D33.1 D33.2 D33.3 D34.1 D34.2 D34.3 D35.1 D35.2 D35.3 D36.1 D36.2 D36.3 D38.1 D38.2 D38.3 D39.1 D39.2 D39.3 D40.1 D40.2 D40.3 D41.1 D41.2 D41.3 D42.1 D42.2 D42.3 D43.1 D43.2 D43.3 D44.1 D44.2 D44.3 D45.1 D45.2 D45.3 D46.1 D46.2 D46.3 D47.1 D47.2 D47.3 D48.1 D48.2 D48.3 J3.44 J3.46 J3.48 J3.50
GLEDB0: J1.3 T1.5 | length 1
  Bottom Layer w0.15: T1.5@2.8,8.65 2.8,8.9 v1(3.3,9.4)
GLEDB1: J1.12 T3.5 | length 1
  Bottom Layer w0.15: T3.5@8.8,8.65 8.8,8.9 v1(9.3,9.4)
GLEDB2: J1.21 T5.5 | length 1
  Bottom Layer w0.15: T5.5@14.8,8.65 14.8,8.9 v1(15.3,9.4)
GLEDB3: J1.29 T7.5 | length 1
  Bottom Layer w0.15: T7.5@20.8,8.65 20.8,8.9 v1(21.3,9.4)
GLEDB4: T9.5 | length 1
  Bottom Layer w0.15: T9.5@26.8,8.65 26.8,8.9 v1(27.3,9.4)
GLEDB5: T11.5 | length 1
  Bottom Layer w0.15: T11.5@32.8,8.65 32.8,8.9 v1(33.3,9.4)
GLEDB6: T13.5 | length 1
  Bottom Layer w0.15: T13.5@38.8,8.65 38.8,8.9 v1(39.3,9.4)
GLEDB7: T15.5 | length 1
  Bottom Layer w0.15: T15.5@44.8,8.65 44.8,8.9 v1(45.3,9.4)
GLEDB8: T17.5 | length 1
  Bottom Layer w0.15: T17.5@50.8,8.65 50.8,8.9 v1(51.3,9.4)
GLEDB9: J1.5 T19.5 | length 1
  Bottom Layer w0.15: T19.5@2.8,16.85 2.8,17.1 v1(3.3,17.6)
GLEDB10: J1.14 T21.5 | length 1
  Bottom Layer w0.15: T21.5@8.8,16.85 8.8,17.1 v1(9.3,17.6)
GLEDB11: J1.23 T23.5 | length 1
  Bottom Layer w0.15: T23.5@14.8,16.85 14.8,17.1 v1(15.3,17.6)
GLEDB12: J1.31 T25.5 | length 1
  Bottom Layer w0.15: T25.5@20.8,16.85 20.8,17.1 v1(21.3,17.6)
GLEDB13: T27.5 | length 1
  Bottom Layer w0.15: T27.5@26.8,16.85 26.8,17.1 v1(27.3,17.6)
GLEDB14: T29.5 | length 1
  Bottom Layer w0.15: T29.5@32.8,16.85 32.8,17.1 v1(33.3,17.6)
GLEDB15: T31.5 | length 1
  Bottom Layer w0.15: T31.5@38.8,16.85 38.8,17.1 v1(39.3,17.6)
GLEDB16: T33.5 | length 1
  Bottom Layer w0.15: T33.5@44.8,16.85 44.8,17.1 v1(45.3,17.6)
GLEDB17: T35.5 | length 1
  Bottom Layer w0.15: T35.5@50.8,16.85 50.8,17.1 v1(51.3,17.6)
GLEDB18: J1.2 T37.5 | length 1
  Bottom Layer w0.15: T37.5@2.8,25.05 2.8,25.3 v1(3.3,25.8)
GLEDB19: J1.10 T39.5 | length 1
  Bottom Layer w0.15: T39.5@8.8,25.05 8.8,25.3 v1(9.3,25.8)
GLEDB20: J1.19 T41.5 | length 1
  Bottom Layer w0.15: T41.5@14.8,25.05 14.8,25.3 v1(15.3,25.8)
GLEDB21: J1.28 T43.5 | length 1
  Bottom Layer w0.15: T43.5@20.8,25.05 20.8,25.3 v1(21.3,25.8)
GLEDB22: T45.5 | length 1
  Bottom Layer w0.15: T45.5@26.8,25.05 26.8,25.3 v1(27.3,25.8)
GLEDB23: T47.5 | length 1
  Bottom Layer w0.15: T47.5@32.8,25.05 32.8,25.3 v1(33.3,25.8)
GLEDB24: T49.5 | length 1
  Bottom Layer w0.15: T49.5@38.8,25.05 38.8,25.3 v1(39.3,25.8)
GLEDB25: T51.5 | length 1
  Bottom Layer w0.15: T51.5@44.8,25.05 44.8,25.3 v1(45.3,25.8)
GLEDB26: T53.5 | length 1
  Bottom Layer w0.15: T53.5@50.8,25.05 50.8,25.3 v1(51.3,25.8)
GLEDB27: T55.5 | length 1
  Bottom Layer w0.15: T55.5@2.8,33.25 2.8,33.5 v1(3.3,34)
GLEDB28: T57.5 | length 1
  Bottom Layer w0.15: T57.5@8.8,33.25 8.8,33.5 v1(9.3,34)
GLEDB29: T59.5 | length 1
  Bottom Layer w0.15: T59.5@14.8,33.25 14.8,33.5 v1(15.3,34)
GLEDB30: T61.5 | length 1
  Bottom Layer w0.15: T61.5@20.8,33.25 20.8,33.5 v1(21.3,34)
GLEDB31: T63.5 | length 1
  Bottom Layer w0.15: T63.5@26.8,33.25 26.8,33.5 v1(27.3,34)
GLEDB32: T65.5 | length 1
  Bottom Layer w0.15: T65.5@32.8,33.25 32.8,33.5 v1(33.3,34)
GLEDB33: T67.5 | length 1
  Bottom Layer w0.15: T67.5@38.8,33.25 38.8,33.5 v1(39.3,34)
GLEDB34: T69.5 | length 1
  Bottom Layer w0.15: T69.5@44.8,33.25 44.8,33.5 v1(45.3,34)
GLEDB35: T71.5 | length 1
  Bottom Layer w0.15: T71.5@50.8,33.25 50.8,33.5 v1(51.3,34)
GLEDB36: T73.5 | length 1
  Bottom Layer w0.15: T73.5@2.8,41.45 2.8,41.7 v1(3.3,42.2)
GLEDB37: T75.5 | length 1
  Bottom Layer w0.15: T75.5@8.8,41.45 8.8,41.7 v1(9.3,42.2)
GLEDB38: T77.5 | length 1
  Bottom Layer w0.15: T77.5@14.8,41.45 14.8,41.7 v1(15.3,42.2)
GLEDB39: T79.5 | length 1
  Bottom Layer w0.15: T79.5@20.8,41.45 20.8,41.7 v1(21.3,42.2)
GLEDB40: T81.5 | length 1
  Bottom Layer w0.15: T81.5@26.8,41.45 26.8,41.7 v1(27.3,42.2)
GLEDB41: T83.5 | length 1
  Bottom Layer w0.15: T83.5@32.8,41.45 32.8,41.7 v1(33.3,42.2)
GLEDB42: T85.5 | length 1
  Bottom Layer w0.15: T85.5@38.8,41.45 38.8,41.7 v1(39.3,42.2)
GLEDB43: T87.5 | length 1
  Bottom Layer w0.15: T87.5@44.8,41.45 44.8,41.7 v1(45.3,42.2)
GLEDB44: T89.5 | length 1
  Bottom Layer w0.15: T89.5@50.8,41.45 50.8,41.7 v1(51.3,42.2)
GLEDB45: T91.5 | length 1
  Bottom Layer w0.15: T91.5@2.8,49.65 2.8,49.9 v1(3.3,50.4)
GLEDB46: T93.5 | length 1
  Bottom Layer w0.15: T93.5@8.8,49.65 8.8,49.9 v1(9.3,50.4)
GLEDB47: T95.5 | length 1
  Bottom Layer w0.15: T95.5@14.8,49.65 14.8,49.9 v1(15.3,50.4)
GLEDG0: J1.9 T2.2 | length 1.1
  Bottom Layer w0.15: v1(5.15,6.15) 5.05,6.15 5,6.2 5.5,6.7 T2.2@5.5,6.95
GLEDG1: J1.18 T4.2 | length 1
  Bottom Layer w0.15: v1@11,6.2 11.5,6.7 T4.2@11.5,6.95
  other v1: 11.15,6.15
GLEDG2: J1.27 T6.2 | length 1
  Bottom Layer w0.15: v1@17,6.2 17.5,6.7 T6.2@17.5,6.95
  other v1: 17.15,6.15
GLEDG3: T8.2 | length 1
  Bottom Layer w0.15: v1@23,6.2 23.5,6.7 T8.2@23.5,6.95
  other v1: 23.15,6.15
GLEDG4: T10.2 | length 1
  Bottom Layer w0.15: v1@29,6.2 29.5,6.7 T10.2@29.5,6.95
  other v1: 29.15,6.15
GLEDG5: T12.2 | length 1
  Bottom Layer w0.15: v1@35,6.2 35.5,6.7 T12.2@35.5,6.95
  other v1: 35.15,6.15
GLEDG6: T14.2 | length 1
  Bottom Layer w0.15: v1@41,6.2 41.5,6.7 T14.2@41.5,6.95
  other v1: 41.15,6.15
GLEDG7: T16.2 | length 1
  Bottom Layer w0.15: v1@47,6.2 47.5,6.7 T16.2@47.5,6.95
  other v1: 47.15,6.15
GLEDG8: T18.2 | length 1
  Bottom Layer w0.15: v1@53,6.2 53.5,6.7 T18.2@53.5,6.95
  other v1: 53.15,6.15
GLEDG9: J1.8 T20.2 | length 1
  Bottom Layer w0.15: v1@5,14.4 5.5,14.9 T20.2@5.5,15.15
  other v1: 5.15,14.35
GLEDG10: J1.17 T22.2 | length 1
  Bottom Layer w0.15: v1@11,14.4 11.5,14.9 T22.2@11.5,15.15
  other v1: 11.15,14.35
GLEDG11: J1.26 T24.2 | length 1
  Bottom Layer w0.15: v1@17,14.4 17.5,14.9 T24.2@17.5,15.15
  other v1: 17.15,14.35
GLEDG12: T26.2 | length 1
  Bottom Layer w0.15: v1@23,14.4 23.5,14.9 T26.2@23.5,15.15
  other v1: 23.15,14.35
GLEDG13: T28.2 | length 1
  Bottom Layer w0.15: v1@29,14.4 29.5,14.9 T28.2@29.5,15.15
  other v1: 29.15,14.35
GLEDG14: T30.2 | length 1
  Bottom Layer w0.15: v1@35,14.4 35.5,14.9 T30.2@35.5,15.15
  other v1: 35.15,14.35
GLEDG15: T32.2 | length 1
  Bottom Layer w0.15: v1@41,14.4 41.5,14.9 T32.2@41.5,15.15
  other v1: 41.15,14.35
GLEDG16: T34.2 | length 1
  Bottom Layer w0.15: v1@47,14.4 47.5,14.9 T34.2@47.5,15.15
  other v1: 47.15,14.35
GLEDG17: T36.2 | length 1
  Bottom Layer w0.15: v1@53,14.4 53.5,14.9 T36.2@53.5,15.15
  other v1: 53.15,14.35
GLEDG18: J1.7 T38.2 | length 1
  Bottom Layer w0.15: v1@5,22.6 5.5,23.1 T38.2@5.5,23.35
  other v1: 5.15,22.55
GLEDG19: J1.16 T40.2 | length 1
  Bottom Layer w0.15: v1@11,22.6 11.5,23.1 T40.2@11.5,23.35
  other v1: 11.15,22.55
GLEDG20: J1.25 T42.2 | length 1
  Bottom Layer w0.15: v1@17,22.6 17.5,23.1 T42.2@17.5,23.35
  other v1: 17.15,22.55
GLEDG21: T44.2 | length 1
  Bottom Layer w0.15: v1@23,22.6 23.5,23.1 T44.2@23.5,23.35
  other v1: 23.15,22.55
GLEDG22: T46.2 | length 1
  Bottom Layer w0.15: v1@29,22.6 29.5,23.1 T46.2@29.5,23.35
  other v1: 29.15,22.55
GLEDG23: T48.2 | length 1
  Bottom Layer w0.15: v1@35,22.6 35.5,23.1 T48.2@35.5,23.35
  other v1: 35.15,22.55
GLEDG24: T50.2 | length 1
  Bottom Layer w0.15: v1@41,22.6 41.5,23.1 T50.2@41.5,23.35
  other v1: 41.15,22.55
GLEDG25: T52.2 | length 1
  Bottom Layer w0.15: v1@47,22.6 47.5,23.1 T52.2@47.5,23.35
  other v1: 47.15,22.55
GLEDG26: T54.2 | length 1
  Bottom Layer w0.15: v1@53,22.6 53.5,23.1 T54.2@53.5,23.35
  other v1: 53.15,22.55
GLEDG27: T56.2 | length 1
  Bottom Layer w0.15: v1@5,30.8 5.5,31.3 T56.2@5.5,31.55
  other v1: 5.15,30.75
GLEDG28: T58.2 | length 1
  Bottom Layer w0.15: v1@11,30.8 11.5,31.3 T58.2@11.5,31.55
  other v1: 11.15,30.75
GLEDG29: T60.2 | length 1
  Bottom Layer w0.15: v1@17,30.8 17.5,31.3 T60.2@17.5,31.55
  other v1: 17.15,30.75
GLEDG30: T62.2 | length 1
  Bottom Layer w0.15: v1@23,30.8 23.5,31.3 T62.2@23.5,31.55
  other v1: 23.15,30.75
GLEDG31: T64.2 | length 1
  Bottom Layer w0.15: v1@29,30.8 29.5,31.3 T64.2@29.5,31.55
  other v1: 29.15,30.75
GLEDG32: T66.2 | length 1
  Bottom Layer w0.15: v1@35,30.8 35.5,31.3 T66.2@35.5,31.55
  other v1: 35.15,30.75
GLEDG33: T68.2 | length 1
  Bottom Layer w0.15: v1@41,30.8 41.5,31.3 T68.2@41.5,31.55
  other v1: 41.15,30.75
GLEDG34: T70.2 | length 1
  Bottom Layer w0.15: v1@47,30.8 47.5,31.3 T70.2@47.5,31.55
  other v1: 47.15,30.75
GLEDG35: T72.2 | length 1
  Bottom Layer w0.15: v1@53,30.8 53.5,31.3 T72.2@53.5,31.55
  other v1: 53.15,30.75
GLEDG36: T74.2 | length 1
  Bottom Layer w0.15: v1@5,39 5.5,39.5 T74.2@5.5,39.75
  other v1: 5.15,38.95
GLEDG37: T76.2 | length 1
  Bottom Layer w0.15: v1@11,39 11.5,39.5 T76.2@11.5,39.75
  other v1: 11.15,38.95
GLEDG38: T78.2 | length 1
  Bottom Layer w0.15: v1@17,39 17.5,39.5 T78.2@17.5,39.75
  other v1: 17.15,38.95
GLEDG39: T80.2 | length 1
  Bottom Layer w0.15: v1@23,39 23.5,39.5 T80.2@23.5,39.75
  other v1: 23.15,38.95
GLEDG40: T82.2 | length 1
  Bottom Layer w0.15: v1@29,39 29.5,39.5 T82.2@29.5,39.75
  other v1: 29.15,38.95
GLEDG41: T84.2 | length 1
  Bottom Layer w0.15: v1@35,39 35.5,39.5 T84.2@35.5,39.75
  other v1: 35.15,38.95
GLEDG42: T86.2 | length 1
  Bottom Layer w0.15: v1@41,39 41.5,39.5 T86.2@41.5,39.75
  other v1: 41.15,38.95
GLEDG43: T88.2 | length 1
  Bottom Layer w0.15: v1@47,39 47.5,39.5 T88.2@47.5,39.75
  other v1: 47.15,38.95
GLEDG44: T90.2 | length 1
  Bottom Layer w0.15: v1@53,39 53.5,39.5 T90.2@53.5,39.75
  other v1: 53.15,38.95
GLEDG45: T92.2 | length 1
  Bottom Layer w0.15: v1@5,47.2 5.5,47.7 T92.2@5.5,47.95
  other v1: 5.15,47.15
GLEDG46: T94.2 | length 1
  Bottom Layer w0.15: v1@11,47.2 11.5,47.7 T94.2@11.5,47.95
  other v1: 11.15,47.15
GLEDG47: T96.2 | length 1
  Bottom Layer w0.15: v1@17,47.2 17.5,47.7 T96.2@17.5,47.95
  other v1: 17.15,47.15
GLEDR0: J1.1 T1.2 | length 1
  Bottom Layer w0.15: v1(2.3,6.15) 2.8,6.65 T1.2@2.8,6.95
GLEDR1: J1.11 T3.2 | length 1
  Bottom Layer w0.15: v1(8.3,6.15) 8.8,6.65 T3.2@8.8,6.95
GLEDR2: J1.20 T5.2 | length 1
  Bottom Layer w0.15: v1(14.3,6.15) 14.8,6.65 T5.2@14.8,6.95
GLEDR3: J1.32 T7.2 | length 1
  Bottom Layer w0.15: v1(20.3,6.15) 20.8,6.65 T7.2@20.8,6.95
GLEDR4: T9.2 | length 1
  Bottom Layer w0.15: v1(26.3,6.15) 26.8,6.65 T9.2@26.8,6.95
GLEDR5: T11.2 | length 1
  Bottom Layer w0.15: v1(32.3,6.15) 32.8,6.65 T11.2@32.8,6.95
GLEDR6: T13.2 | length 1
  Bottom Layer w0.15: v1(38.3,6.15) 38.8,6.65 T13.2@38.8,6.95
GLEDR7: T15.2 | length 1
  Bottom Layer w0.15: v1(44.3,6.15) 44.8,6.65 T15.2@44.8,6.95
GLEDR8: T17.2 | length 1
  Bottom Layer w0.15: v1(50.3,6.15) 50.8,6.65 T17.2@50.8,6.95
GLEDR9: J1.4 T19.2 | length 1
  Bottom Layer w0.15: v1(2.3,14.35) 2.8,14.85 T19.2@2.8,15.15
GLEDR10: J1.13 T21.2 | length 1
  Bottom Layer w0.15: v1(8.3,14.35) 8.8,14.85 T21.2@8.8,15.15
GLEDR11: J1.22 T23.2 | length 1
  Bottom Layer w0.15: v1(14.3,14.35) 14.8,14.85 T23.2@14.8,15.15
GLEDR12: J1.30 T25.2 | length 1
  Bottom Layer w0.15: v1(20.3,14.35) 20.8,14.85 T25.2@20.8,15.15
GLEDR13: T27.2 | length 1
  Bottom Layer w0.15: v1(26.3,14.35) 26.8,14.85 T27.2@26.8,15.15
GLEDR14: T29.2 | length 1
  Bottom Layer w0.15: v1(32.3,14.35) 32.8,14.85 T29.2@32.8,15.15
GLEDR15: T31.2 | length 1
  Bottom Layer w0.15: v1(38.3,14.35) 38.8,14.85 T31.2@38.8,15.15
GLEDR16: T33.2 | length 1
  Bottom Layer w0.15: v1(44.3,14.35) 44.8,14.85 T33.2@44.8,15.15
GLEDR17: T35.2 | length 1
  Bottom Layer w0.15: v1(50.3,14.35) 50.8,14.85 T35.2@50.8,15.15
GLEDR18: J1.6 T37.2 | length 1
  Bottom Layer w0.15: v1(2.3,22.55) 2.8,23.05 T37.2@2.8,23.35
GLEDR19: J1.15 T39.2 | length 1
  Bottom Layer w0.15: v1(8.3,22.55) 8.8,23.05 T39.2@8.8,23.35
GLEDR20: J1.24 T41.2 | length 1
  Bottom Layer w0.15: v1(14.3,22.55) 14.8,23.05 T41.2@14.8,23.35
GLEDR21: T43.2 | length 1
  Bottom Layer w0.15: v1(20.3,22.55) 20.8,23.05 T43.2@20.8,23.35
GLEDR22: T45.2 | length 1
  Bottom Layer w0.15: v1(26.3,22.55) 26.8,23.05 T45.2@26.8,23.35
GLEDR23: T47.2 | length 1
  Bottom Layer w0.15: v1(32.3,22.55) 32.8,23.05 T47.2@32.8,23.35
GLEDR24: T49.2 | length 1
  Bottom Layer w0.15: v1(38.3,22.55) 38.8,23.05 T49.2@38.8,23.35
GLEDR25: T51.2 | length 1
  Bottom Layer w0.15: v1(44.3,22.55) 44.8,23.05 T51.2@44.8,23.35
GLEDR26: T53.2 | length 1
  Bottom Layer w0.15: v1(50.3,22.55) 50.8,23.05 T53.2@50.8,23.35
GLEDR27: T55.2 | length 1
  Bottom Layer w0.15: v1(2.3,30.75) 2.8,31.25 T55.2@2.8,31.55
GLEDR28: T57.2 | length 1
  Bottom Layer w0.15: v1(8.3,30.75) 8.8,31.25 T57.2@8.8,31.55
GLEDR29: T59.2 | length 1
  Bottom Layer w0.15: v1(14.3,30.75) 14.8,31.25 T59.2@14.8,31.55
GLEDR30: T61.2 | length 1
  Bottom Layer w0.15: v1(20.3,30.75) 20.8,31.25 T61.2@20.8,31.55
GLEDR31: T63.2 | length 1
  Bottom Layer w0.15: v1(26.3,30.75) 26.8,31.25 T63.2@26.8,31.55
GLEDR32: T65.2 | length 1
  Bottom Layer w0.15: v1(32.3,30.75) 32.8,31.25 T65.2@32.8,31.55
GLEDR33: T67.2 | length 1
  Bottom Layer w0.15: v1(38.3,30.75) 38.8,31.25 T67.2@38.8,31.55
GLEDR34: T69.2 | length 1
  Bottom Layer w0.15: v1(44.3,30.75) 44.8,31.25 T69.2@44.8,31.55
GLEDR35: T71.2 | length 1
  Bottom Layer w0.15: v1(50.3,30.75) 50.8,31.25 T71.2@50.8,31.55
GLEDR36: T73.2 | length 1
  Bottom Layer w0.15: v1(2.3,38.95) 2.8,39.45 T73.2@2.8,39.75
GLEDR37: T75.2 | length 1
  Bottom Layer w0.15: v1(8.3,38.95) 8.8,39.45 T75.2@8.8,39.75
GLEDR38: T77.2 | length 1
  Bottom Layer w0.15: v1(14.3,38.95) 14.8,39.45 T77.2@14.8,39.75
GLEDR39: T79.2 | length 1
  Bottom Layer w0.15: v1(20.3,38.95) 20.8,39.45 T79.2@20.8,39.75
GLEDR40: T81.2 | length 1
  Bottom Layer w0.15: v1(26.3,38.95) 26.8,39.45 T81.2@26.8,39.75
GLEDR41: T83.2 | length 1
  Bottom Layer w0.15: v1(32.3,38.95) 32.8,39.45 T83.2@32.8,39.75
GLEDR42: T85.2 | length 1
  Bottom Layer w0.15: v1(38.3,38.95) 38.8,39.45 T85.2@38.8,39.75
GLEDR43: T87.2 | length 1
  Bottom Layer w0.15: v1(44.3,38.95) 44.8,39.45 T87.2@44.8,39.75
GLEDR44: T89.2 | length 1
  Bottom Layer w0.15: v1(50.3,38.95) 50.8,39.45 T89.2@50.8,39.75
GLEDR45: T91.2 | length 1
  Bottom Layer w0.15: v1(2.3,47.15) 2.8,47.65 T91.2@2.8,47.95
GLEDR46: T93.2 | length 1
  Bottom Layer w0.15: v1(8.3,47.15) 8.8,47.65 T93.2@8.8,47.95
GLEDR47: T95.2 | length 1
  Bottom Layer w0.15: v1(14.3,47.15) 14.8,47.65 T95.2@14.8,47.95